# Altium PCB 拼接.PcbDoc
Units mil, origin at the board's own origin, x right, y up, seen from the top; angles counter-clockwise.
Board outline 6000 x 4000 mil, 2 copper layers (Top Layer, Bottom Layer); 11 components, 0 nets, 35 pads, 13 vias.
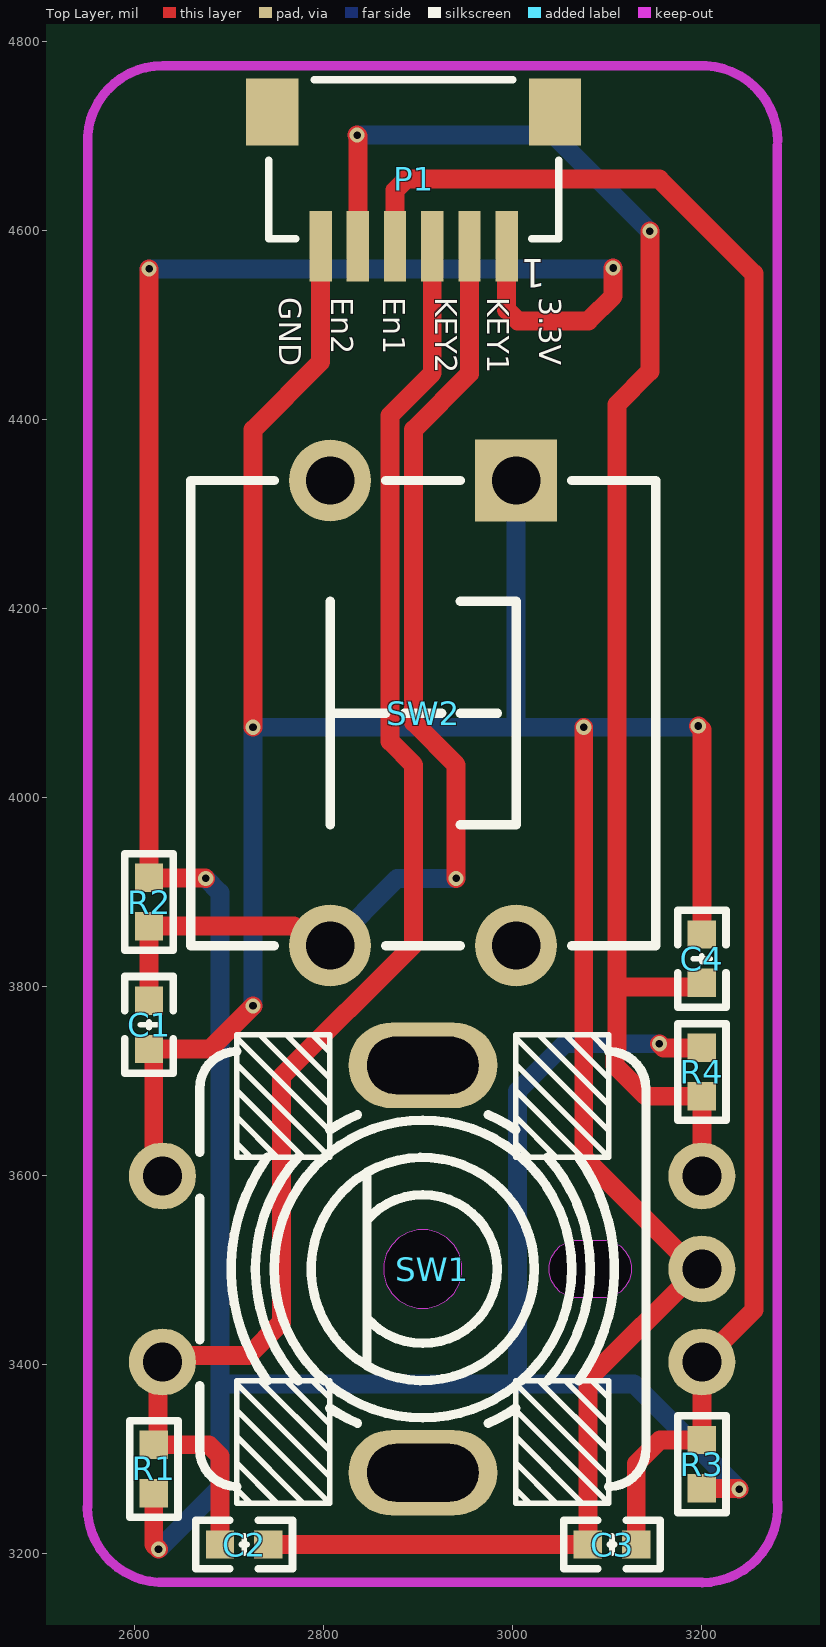
[diagram p0: Top Layer view]
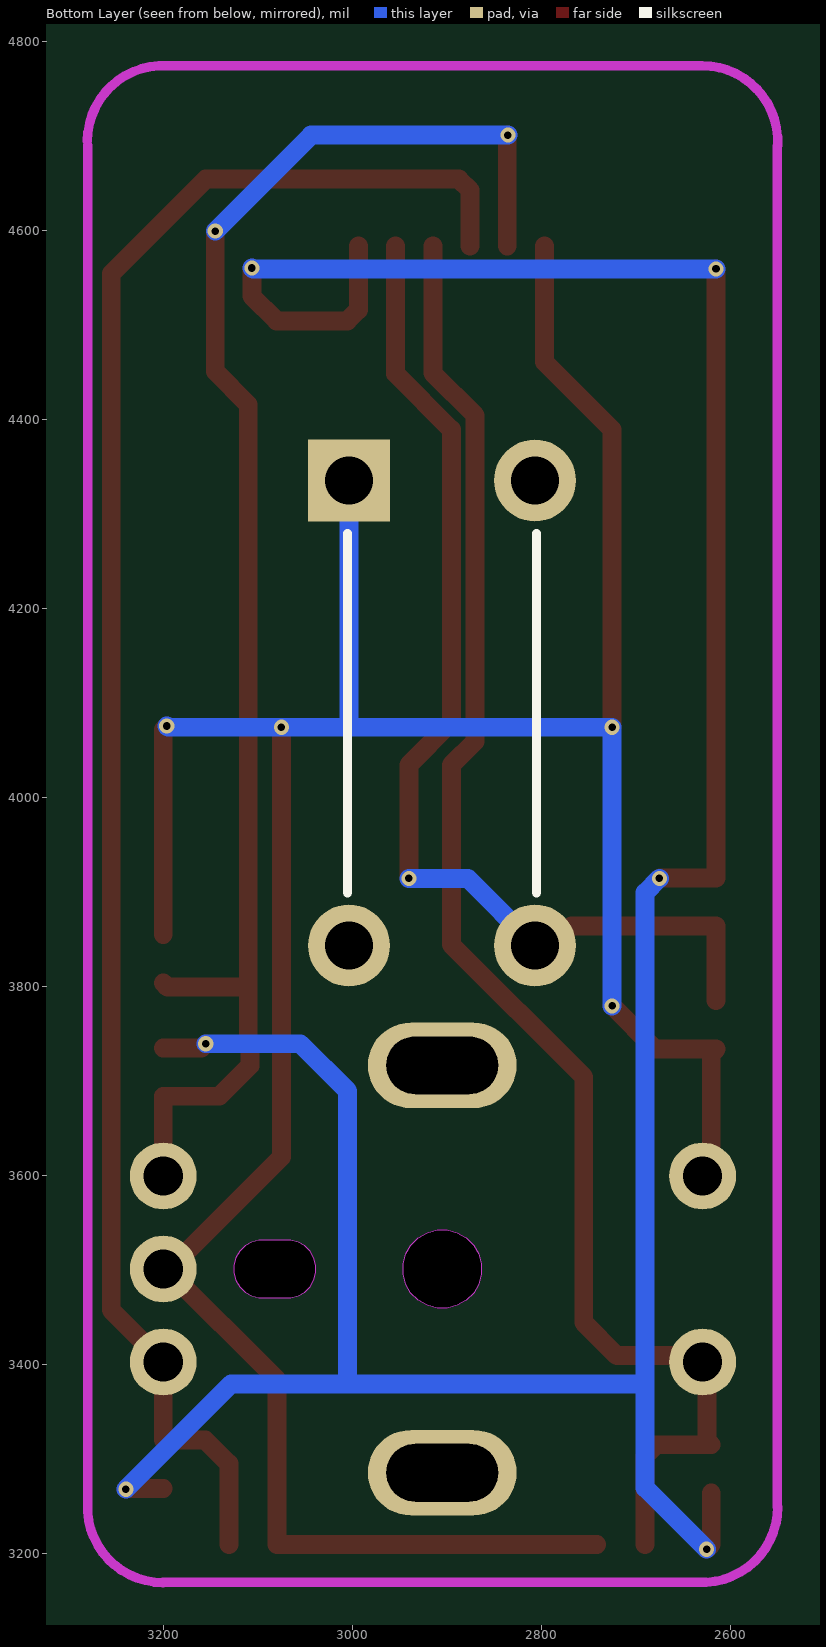
[diagram p1: Bottom Layer view, seen from below]

## Layer stack, top to bottom
Top Solder: solder mask 0.4, Solder Resist, Dk 3.5
Top Layer: signal copper 1.4
Dielectric 1: dielectric 12.6, FR-4, Dk 4.8
Bottom Layer: signal copper 1.4
Bottom Solder: solder mask 0.4, Solder Resist, Dk 3.5

## Board outline
1000,1000 7000,1000 7000,5000 1000,5000

## Design rules (kind name [scope] priority, off if disabled: settings)
Clearance [All] p1: gap=10 ignorepadtopadclearanceinfootprint=FALSE except(0: Arc-Hole Track-Hole SMDPad-Hole THPad-Hole Via-Hole Fill-Hole Poly-Hole Region-Hole Text-Hole)
PolygonConnect [All] p1: connectstyle=Relief reliefconductorwidth=10 reliefentries=4 polygonreliefangle="90 Angle" airgapwidth=10
RoutingVias [All] p1: holewidth=28 width=50 viastyle="Through Hole" minholewidth=28 minwidth=50 maxholewidth=28 maxwidth=50
SolderMaskExpansion [All] p1: expansion=4 istentingtop=FALSE
Width [All] p1: maxlimit=10 minlimit=10 preferedwidth=10
30 further rules are at their usual default settings.

## Components (designator, comment, footprint, x,y, rotation, side; value= is the part's Value field where it differs from the comment)
C1 "0.1uF" C0603_L 2615,3759.41 r270 top
C2 "0.1uF" C0603_L 2715.59,3209.42 r0 top
C3 "0.1uF" C0603_L 3105,3209.41 r180 top
C4 "0.1uF" C0603_L 3200,3829.41 r90 top
P1 "SH1.0 6P" "SH 1.0-WS-6P" 2895,4654.41 r180 top
R1 "10K" R0603_L 2620,3289.41 r270 top
R2 "10K" R0603_L 2615,3889.41 r90 top
R3 "10K" R0603_L 3200,3294.41 r270 top
R4 "10K" R0603_L 3200,3709.41 r90 top
SW1 "EC11K1524406" "SW-TH_EC11K1524406 - duplicate" 2914.57,3500.99 r90 top locked
SW2 "12x12x5" "SW DIP-12*12*4.3" 2905,4089.41 r270 top

## Footprints (in the part's own frame and the unit in brackets; to place one, negate y for a bottom-side part, rotate by r counter-clockwise, add the part's x,y. Pads: shape width x height; smd on the part's side, far side on the other; paste and mask are expansions set on the pad)
C0603_L [mil] "无极性贴片电容"
  rect 30x30 smd: 1(-25.59,0) 2(25.59,0)
  silkscreen extent -51,-26 51,26, body extent -31,-16 32,16, height 33
R0603_L [mil] "1/10W贴片电阻"
  rect 30x30 smd: 1(-25.59,0) 2(25.59,0)
  silkscreen extent -51,-26 51,26, body extent -31,-16 32,16, height 16
"SH 1.0-WS-6P" [mm]
  rect 1.4x1.8 smd: 0(-3.8,-1.8) 0(3.8,-1.8)
  rect 0.6x1.9 smd: 1(-2.5,1.8) 2(-1.5,1.8) 3(-0.5,1.8) 4(0.5,1.8) 5(1.5,1.8) 6(2.5,1.8)
  silkscreen extent -3.9,-2.67 3.9,1.6, body extent -4,-2.73 4,2.22, height 2.9
"SW DIP-12*12*4.3" [mm] "12*12*4.3mm                                 淘宝ID:黄晶宝石"
  rect 2.2x2.2 hole 1.3: 1(-6.25,2.5)
  round 2.2 hole 1.3: 2(-6.25,-2.5) 3(6.25,-2.5) 4(6.25,2.5)
  silkscreen extent -6.25,-6.25 6.25,6.25, body extent -6.9,-6 6.9,6, height 4.45
"SW-TH_EC11K1524406 - duplicate" [mm]
  round 1.8 hole 1.05 mask+0.051: A(-2.5,-7.25) B(2.5,-7.25) C(0,-7.25) D(-2.5,7.25) E(2.5,7.25)
  oval 2.3x4 hole 1.55 slot 3 at 90 deg copper offset 0,0 mask+0.051: MH1(-5.475,0.25)
  oval 2.3x4 hole 1.55 slot 3 at 90 deg mask+0.051: MH2(5.475,0.25)
  Keep-Out Layer board cut-out: 0.775,-4.575 0.775,-4.677 0.722,-4.874 0.62,-5.051 0.476,-5.195 0.299,-5.297 0.102,-5.35 -0.102,-5.35 -0.299,-5.297 -0.476,-5.195 -0.62,-5.051 -0.722,-4.874 -0.775,-4.677 -0.775,-4.575 -0.775,-4.575 -0.775,-3.925 -0.775,-3.823 -0.722,-3.626 -0.62,-3.449 -0.476,-3.305 -0.299,-3.203 -0.102,-3.15 0.102,-3.15 0.299,-3.203 0.476,-3.305 0.62,-3.449 0.722,-3.626 0.775,-3.823 0.775,-3.925 0.775,-3.925 0.775,-4.575
  Keep-Out Layer board cut-out: 1.05,0.25 1.05,0.388 0.978,0.655 0.84,0.895 0.645,1.09 0.405,1.228 0.138,1.3 -0.138,1.3 -0.405,1.228 -0.645,1.09 -0.84,0.895 -0.978,0.655 -1.05,0.388 -1.05,0.25 -1.05,0.112 -0.978,-0.155 -0.84,-0.395 -0.645,-0.59 -0.405,-0.729 -0.138,-0.8 0.138,-0.8 0.405,-0.729 0.645,-0.59 0.84,-0.395 0.978,-0.155 1.05,0.112 1.05,0.25 1.05,0.25
  silkscreen extent -6.3,-5.75 6.3,6.25

## Part data
C1 C2 C3 C4: library part C, "贴片电容", BOM名称=无极性贴片电容, 联系卖家，免费查找封装=唯一出售店铺网址https://shop463601444.taobao.com
P1: library part "Header 6", "Header, 6-Pin", LatestRevisionDate=17-Jul-2002, LatestRevisionNote="Re-released for DXP Platform.", Publisher="Altium Limited"
R1 R2 R3 R4: library part R, "贴片电阻", BOM名称=贴片电阻, 封装库来自淘宝卖家ID：黄晶宝石=其他店铺购入均为盗版假冒封装库，请立即申请退款, 联系卖家，免费查找封装=唯一出售店铺网址https://shop463601444.taobao.com
SW1: JLCPCB Part Class="Extended Part", LCSC Part Name=编码器, Manufacturer=ALPSALPINE(阿尔卑斯阿尔派), Add into BOM=yes, Convert to PCB=yes, Datasheet=https://atta.szlcsc.com/upload/public/pdf/source/20190620/C398934_DDD5BF6D843226194F24C74B1929B82F.pdf, Device=EC11K1524406, Manufacturer Part=EC11K1524406, Name=EC11K1524406, Supplier=LCSC, Supplier Footprint=插件, Supplier Part=C398934, Symbol=EC11K1524406
SW2: library part "TSW DIP-12x12", "直插12x12轻触开关", BOM名称=直插12x12轻触开关, 联系卖家，免费查找封装=唯一出售店铺网址https://shop463601444.taobao.com

## Via types
v1: diameter 16, hole 8, Top Layer to Bottom Layer, 13 vias

## Nets (pads, with @x,y where several pads share a name; then routed paths per layer and width w, separated by ;. In a path a pad name is that pad's centre, name@x,y a point inside that pad or via, vN(x,y) a via of type N, cw(c..) or ccw(c..) an arc to the next point about the centre after c; other vN are vias at no path point)
pads on no net: C1.1 C1.2 C2.1 C2.2 C3.1 C3.2 C4.1 C4.2 P1.0 P1.1 P1.2 P1.3 P1.4 P1.5 P1.6 R1.1 R1.2 R2.1 R2.2 R3.1 R3.2 R4.1 R4.2 SW1.A SW1.B SW1.C SW1.D SW1.E SW1.MH1 SW1.MH2 SW2.1 SW2.2 SW2.3 SW2.4
copper on no net: | length 13095.1
  Top Layer w20: 2615,3785.01 2615,3863.82 2768.08,3863.82 2788.55,3843.35 2806.57,3843.35 ; v1(2615,4559.41) 2615,3915 2674.41,3915 v1(2675,3914.41) ; 2619.99,3263.83 2619.99,3209.42 v1(2625,3204.41) ; 2629.14,3599.41 2619.99,3608.56 2619.99,3728.83 2614.99,3733.83 2679.41,3733.83 v1(2725,3779.41) ; 2690,3209.41 2690,3303.29 2678.28,3315.01 2619.99,3315.01 2624.57,3319.58 2624.57,3397.99 2629.14,3402.56 2635.99,3409.41 2720,3409.41 2755,3444.41 2755,3704.41 2895,3844.41 2895,4034.41 2870,4059.41 2870,4404.41 2914.68,4449.1 2914.68,4583.55 ; v1(2725,4074.41) 2725,4389.41 2796.57,4460.99 2796.57,4583.55 ; 2741.18,3209.41 3079.41,3209.41 3079.41,3383.82 3196.57,3500.98 ; v1(2835.22,4700.99) 2835.94,4700.26 2835.94,4583.55 ; 2875.31,4583.55 2875.31,4642.7 2887.03,4654.41 3155,4654.41 3255,4554.41 3255,3457.56 3200,3402.56 3200,3320.01 3155.59,3320.01 3130.59,3295.01 3130.59,3209.42 ; v1(2940,3914.41) 2940,4034.41 2895,4079.41 2895,4389.41 2954.05,4448.47 2954.05,4583.55 ; 2993.42,4583.55 2993.42,4516.13 3005.14,4504.41 3080,4504.41 3106.14,4530.55 v1(3106.14,4560.37) ; v1(3075,4074.41) 3075,3619.41 3193.43,3500.98 3196.57,3500.98 ; v1(3145,4599.41) 3145,4450.92 3110,4415.92 3110,3799.41 ; v1(3155,3739.41) 3159.41,3735 3200,3735 ; v1(3196.25,4075.66) 3200,4071.91 3200,3855 ; 3199.99,3268.83 3238.6,3268.83 v1(3239.45,3267.97) ; 3200,3500.98 3196.57,3500.98 ; 3200,3599.42 3200,3683.82 3140.59,3683.82 3108.28,3716.13 3108.28,3732.7 3110,3734.41 3110,3799.41 ; 3200,3803.82 3195.59,3799.41 3110,3799.41
  Bottom Layer w20: v1(2615,4559.41) 3105.18,4559.41 v1(3106.14,4560.37) ; v1(2625,3204.41) 2690,3269.41 2690,3379.41 ; v1(2675,3914.41) 2690,3899.41 2690,3379.41 ; v1(2725,3779.41) v1(2725,4074.41) 3003.42,4074.41 ; 2806.57,3843.35 2877.63,3914.41 v1(2940,3914.41) ; v1(2835.22,4700.99) 3043.42,4700.99 v1(3145,4599.41) ; 3003.42,4335.48 3003.42,4074.41 ; v1(3155,3739.41) 3055,3739.41 3005,3689.41 3005,3379.41 ; v1(3196.25,4075.66) 3195,4074.41 v1(3075,4074.41) 3003.42,4074.41 ; v1(3239.45,3267.97) 3128.01,3379.41 3005,3379.41 ; 2690,3379.41 3005,3379.41

## Keep-outs
Keep-Out Layer:
  lines w10: 2549.79,3249.18 ccw(c2629.79,3249.18) 2634.48,3169.32 ; 2549.9,4689.93 cw(c2629.76,4694.62) 2629.76,4774.62 ; 2550,3249.18 2550,4689.93 ; 2629.76,4774.53 3195.49,4774.53 ; 2634.48,3169.41 3200.23,3169.41 ; 3195.51,4774.51 cw(c3200.21,4694.65) 3280.21,4694.65 ; 3200.23,3169.2 ccw(c3200.23,3249.2) 3280.09,3253.9 ; 3280,3254.41 3280,4690.02

## Silkscreen, mask and mechanical layers (free items; w line width, h text height)
Top Overlay:
  text "GND" at 2745,4529.6 h40 r270
  text "En2" at 2800,4529.6 h40 r270
  text "En1" at 2855,4529.6 h40 r270
  text "KEY2" at 2910,4529.41 h40 r270
  text "KEY1" at 2965,4529.41 h40 r270
  text "3.3V" at 3020,4529.41 h40 r270
Mechanical 1:
  lines w10: 2549.79,3249.18 ccw(c2629.79,3249.18) 2634.48,3169.32 2634.48,3169.41 3200.23,3169.41 3200.23,3169.2 ccw(c3200.23,3249.2) 3280.09,3253.9 3280,3254.41 3280,4690.02 3280.21,4694.65 ccw(c3200.21,4694.65) 3195.51,4774.51 3195.49,4774.53 2629.76,4774.53 2629.76,4774.62 ccw(c2629.76,4694.62) 2549.9,4689.93 2550,4689.93 2550,3249.18 ; 2863.39,3495.55 2863.39,3506.44 2866.21,3516.95 2871.65,3526.38 2879.35,3534.07 2888.77,3539.52 2899.29,3542.33 2904.73,3542.33 2910.17,3542.33 2920.69,3539.52 2930.11,3534.07 2937.81,3526.38 2943.25,3516.95 2946.07,3506.44 2946.07,3495.55 2943.25,3485.04 2937.81,3475.61 2930.11,3467.92 2920.69,3462.47 2910.17,3459.66 2904.73,3459.66 2899.29,3459.66 2888.77,3462.47 2879.35,3467.92 2871.65,3475.61 2866.21,3485.04 2863.39,3495.55 ; 3038.58,3496.98 3040.66,3489.22 3044.68,3482.26 3050.36,3476.58 3057.32,3472.56 3065.08,3470.48 3069.09,3470.48 3094.68,3470.48 3098.7,3470.48 3106.46,3472.56 3113.42,3476.58 3119.1,3482.26 3123.12,3489.22 3125.2,3496.98 3125.2,3505.01 3123.12,3512.77 3119.1,3519.73 3113.42,3525.41 3106.46,3529.43 3098.7,3531.51 3094.68,3531.51 3069.09,3531.51 3065.08,3531.51 3057.32,3529.43 3050.36,3525.41 3044.68,3519.73 3040.66,3512.77 3038.58,3505.01 3038.58,3496.98

## Text inside footprints (layer, text, board x,y; h text height)
P1: Top Overlay "1" at 3035,4569.41 h30 r180